# Altium PCB CM0P013.PcbDoc
Units mm, origin at the board's own origin, x right, y up, seen from the top; angles counter-clockwise.
Board outline 72.82 x 28.53 mm, 2 copper layers (Top Layer, Bottom Layer), stack 1.07 mm thick; 55 components, 29 nets, 137 pads, 4 vias.
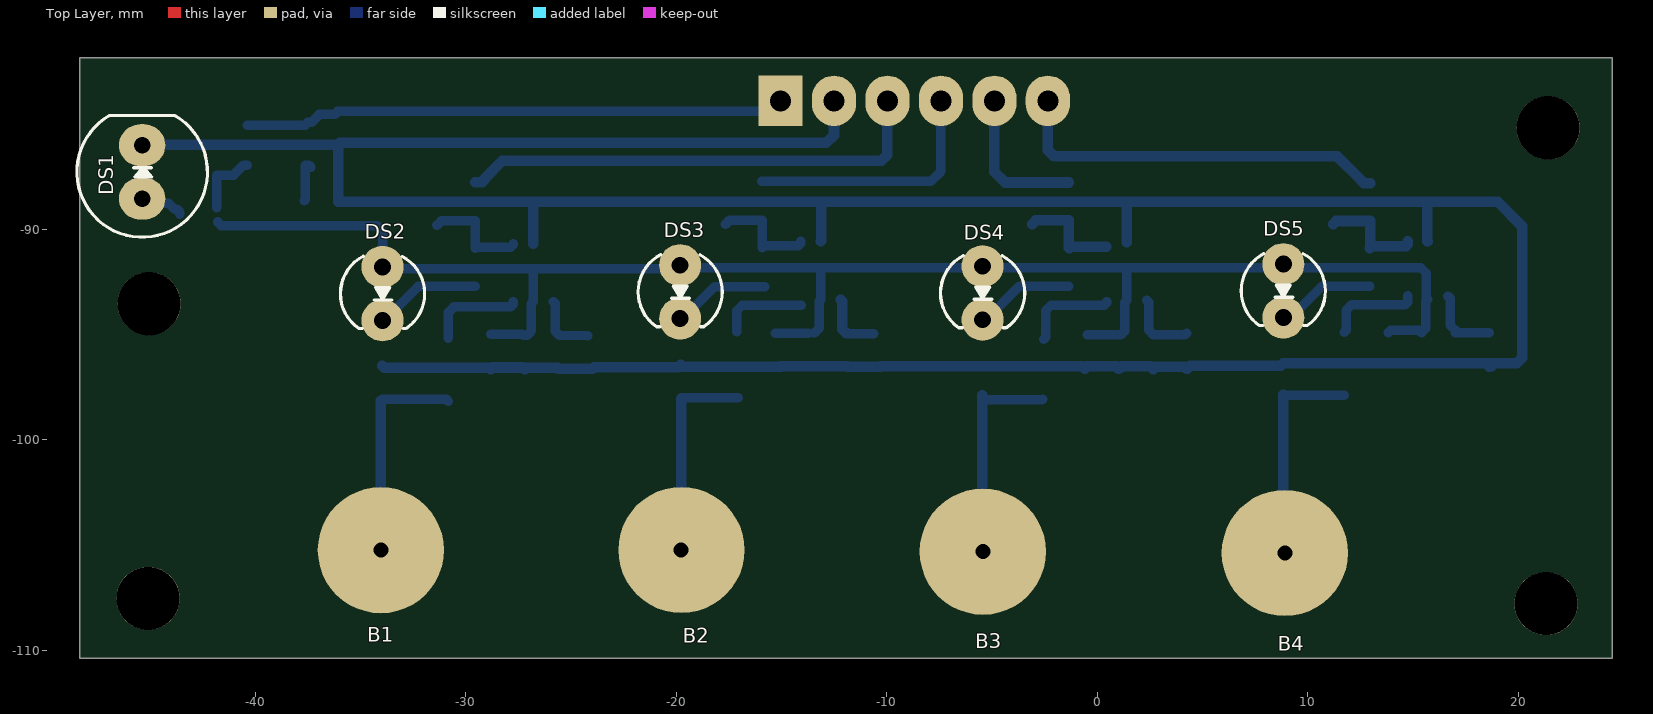
[diagram p0: Top Layer view]
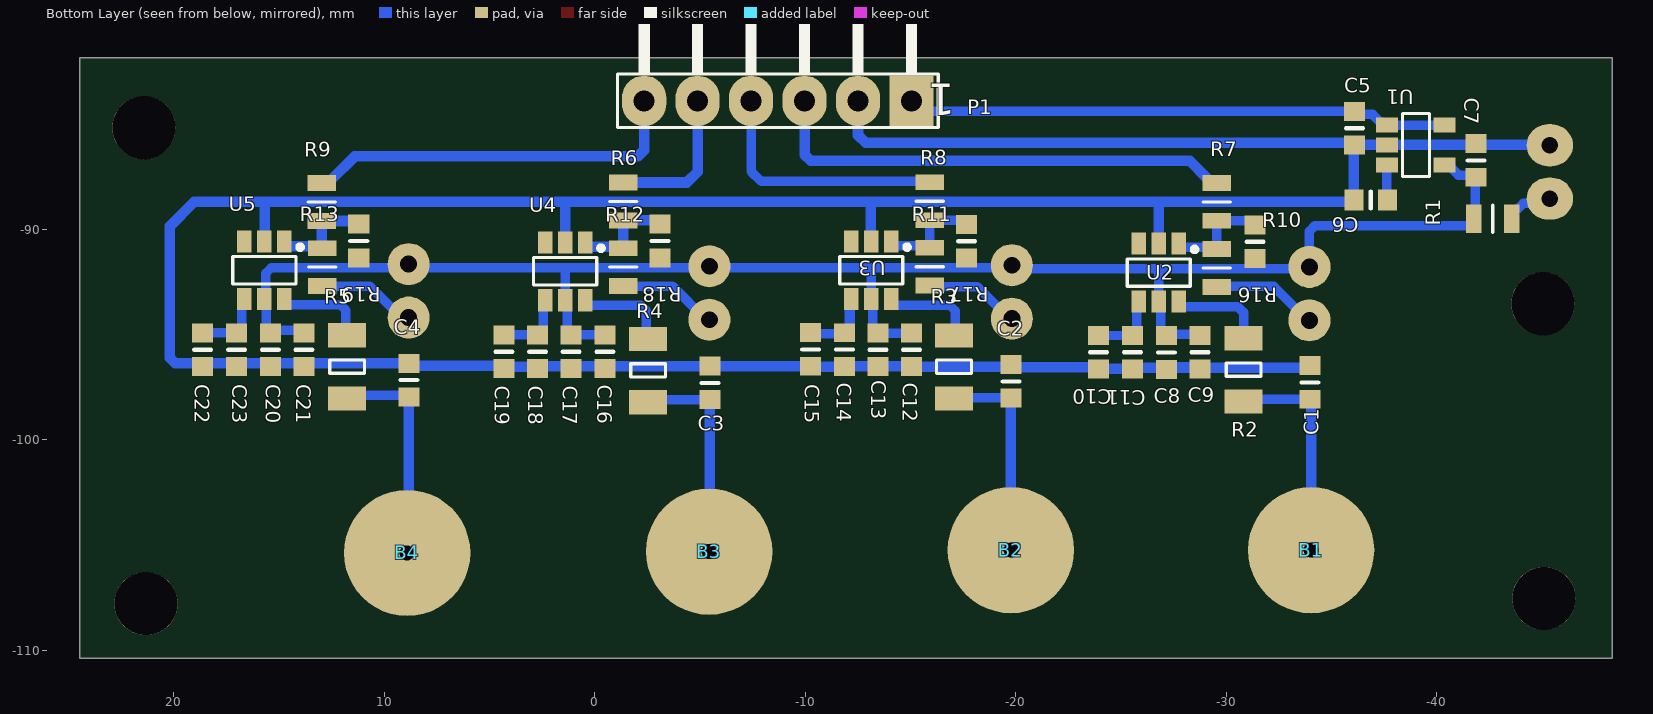
[diagram p1: Bottom Layer view, seen from below]
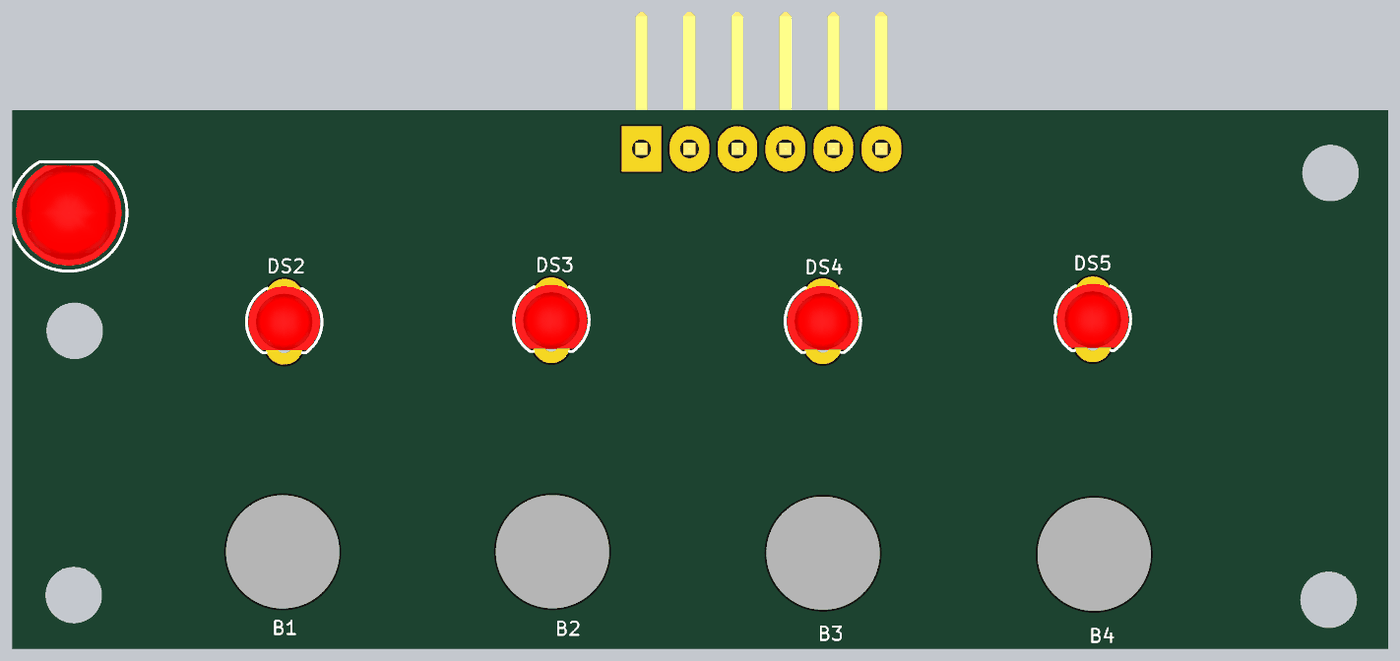
[diagram p2: 3D render of the assembled board from above, using the file's embedded part models]
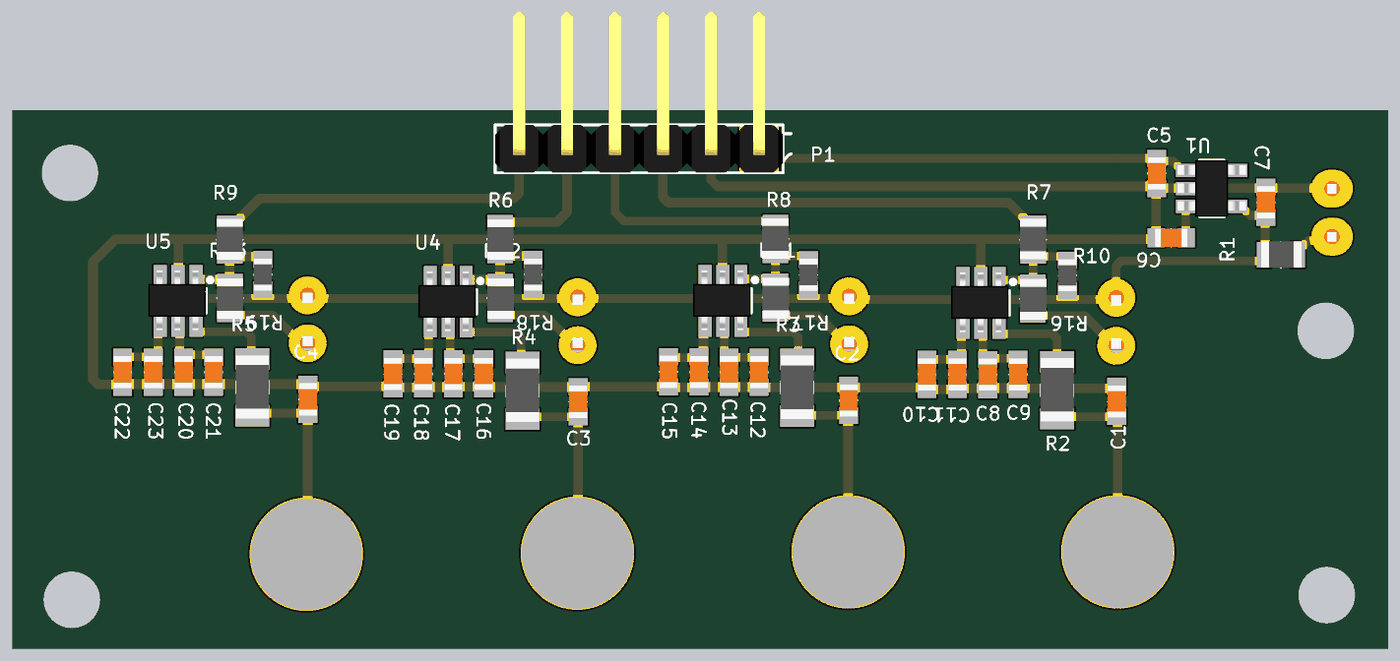
[diagram p3: 3D render of the assembled board from below, using the file's embedded part models]

## Layer stack, top to bottom
Top Solder: solder mask 0.01, Solder Resist, Dk 3.5
Top Layer: signal copper 0.035
Dielectric1: core 1, FR-4, Dk 4.8
Bottom Layer: signal copper 0.035
Bottom Solder: solder mask 0.0102, Solder Resist, Dk 3.5

## Board outline
-48.35,-110.38 24.47,-110.38 24.47,-81.85 -48.35,-81.85

## Design rules (kind name [scope] priority, off if disabled: settings)
Clearance "Route Clearance" [((ObjectKind = 'Track') or (Objectkind = 'Arc')) And (Layer = 'KeepOutLayer') And (Width = AsMM(0.005))] p1: gap=0.35 ignorepadtopadclearanceinfootprint=FALSE except(0: Arc-Hole Track-Hole SMDPad-Hole THPad-Hole Via-Hole Fill-Hole Poly-Hole Region-Hole Text-Hole)
Clearance "V-Score Clearance" [(ObjectKind = 'Track') And (Layer = 'KeepOutLayer') And (Width = AsMM(0.01))] p2: gap=0.5 ignorepadtopadclearanceinfootprint=FALSE except(0: Arc-Hole Track-Hole SMDPad-Hole THPad-Hole Via-Hole Fill-Hole Poly-Hole Region-Hole Text-Hole)
Clearance Via-SMD-Clearance [isvia vs onsoldermask] p3: gap=0.1 ignorepadtopadclearanceinfootprint=FALSE except(0: Arc-Hole Track-Hole SMDPad-Hole THPad-Hole Via-Hole Fill-Hole Poly-Hole Region-Hole Text-Hole)
Clearance "Cu Pour Top" [Innamedpolygon ('Top')] p4: gap=0.3 ignorepadtopadclearanceinfootprint=FALSE except(0: Arc-Hole Track-Hole SMDPad-Hole THPad-Hole Via-Hole Fill-Hole Poly-Hole Region-Hole Text-Hole)
Clearance "Cu Pour Bot" [Innamedpolygon ('Bot')] p5: gap=0.3 ignorepadtopadclearanceinfootprint=FALSE except(0: Arc-Hole Track-Hole SMDPad-Hole THPad-Hole Via-Hole Fill-Hole Poly-Hole Region-Hole Text-Hole)
Clearance Clearance_General [All] p6: gap=0.2 ignorepadtopadclearanceinfootprint=FALSE except(0: Arc-Hole Track-Hole SMDPad-Hole THPad-Hole Via-Hole Fill-Hole Poly-Hole Region-Hole Text-Hole)
Clearance "Mountinghole Clearance" [(ObjectKind = 'Pad') And (Layer = 'MultiLayer') And (Net = 'No Net')] p7: gap=0.15 ignorepadtopadclearanceinfootprint=FALSE except(0: Arc-Hole Track-Hole SMDPad-Hole THPad-Hole Via-Hole Fill-Hole Poly-Hole Region-Hole Text-Hole)
Clearance "Testpoint Spacing" [hasfootprint('TEST-POINT-1.5MM') vs hasfootprint('TEST-POINT-1.5MM')] p8: gap=0.8 ignorepadtopadclearanceinfootprint=FALSE except(0: Arc-Hole Track-Hole SMDPad-Hole THPad-Hole Via-Hole Fill-Hole Poly-Hole Region-Hole Text-Hole)
Clearance "Handsolder Top" [(Name = 'Component name') or (Name = 'Component name') or (Name = 'Component name') vs not(onbottom) and (not(istrack or (Layer = 'KeepOutLayer')))] p9: gap=1 ignorepadtopadclearanceinfootprint=FALSE except(0: Arc-Hole Track-Hole SMDPad-Hole THPad-Hole Via-Hole Fill-Hole Poly-Hole Region-Hole Text-Hole)
ComponentClearance [All] p1: gap=0.5 collisioncheckmode=3 verticalgap=0.5 showdistances=FALSE
DiffPairsRouting [All] p1: maxlimit=0.3 minlimit=0.15 mostfreqgap=0.2 toplayer_minwidth=0.381 toplayer_maxwidth=0.381 toplayer_prefwidth=0.381 bottomlayer_minwidth=0.381 bottomlayer_maxwidth=0.381 bottomlayer_prefwidth=0.381 maxuncoupledlength=12.7
FabricationTestPointUsage TestPointUsage [All] p1 off: valid=0 allowmultiple=FALSE
FabricationTestpoint Testpoint [All] p1 off: side=3 testpointundercomponent=TRUE minsize=1.016 maxsize=2.54 preferedsize=1.524 minholesize=0 maxholesize=1.016 preferedholesize=0.813 testpointgrid=0.025 allowsidetop=TRUE allowsidebottom=TRUE usegrid=TRUE gridtolerance=0
FanoutControl Fanout_BGA [IsBGA] p1 off: bgadir=Out bgaviamode=Centered fanoutstyle=Auto fanoutdirection=Alternating viagrid=0.025 // Fanout_BGA (Default Rule)
FanoutControl Fanout_LCC [IsLCC] p2 off: bgadir=Out bgaviamode=Centered fanoutstyle=Auto fanoutdirection=Alternating viagrid=0.025 // Fanout_LCC (Default Rule)
FanoutControl Fanout_SOIC [IsSOIC] p3 off: bgadir=Out bgaviamode=Centered fanoutstyle=Auto fanoutdirection=Alternating viagrid=0.025 // Fanout_SOIC (Default Rule)
FanoutControl Fanout_Small [(CompPinCount < 5)] p4 off: bgadir=Out bgaviamode=Centered fanoutstyle=Auto fanoutdirection=OutThenIn viagrid=0.025 // Fanout_Small (Default Rule)
FanoutControl Fanout_Default [All] p5 off: bgadir=Out bgaviamode=Centered fanoutstyle=Auto fanoutdirection=Alternating viagrid=0.025 // Fanout_Default (Default Rule)
HoleSize [All] p1 off: absolutevalues=TRUE maxlimit=4 minlimit=0.3 maxpercent=80.000 minpercent=20.000
HoleToHoleClearance [All] p1: gap=0.3 allowstackedmicrovias=TRUE
LayerPairs [All] p1 off: enforce=TRUE
MinimumSolderMaskSliver [All] p1: minsoldermaskwidth=0.2
PlaneClearance [All] p1 off: clearance=0.3
PlaneConnect PlaneConnect_Pads [Ispad] p1 off: planeconnectstyle=Relief reliefexpansion=0.5 reliefentries=4 reliefconductorwidth=0.35 reliefairgap=0.25
PlaneConnect PlaneConnect_Vias [Isvia] p2 off: planeconnectstyle=Direct reliefexpansion=0.508 reliefentries=4 reliefconductorwidth=0.254 reliefairgap=0.254
PolygonConnect PolygonConnectVia [IsVia] p1: connectstyle=Direct reliefconductorwidth=0.254 reliefentries=4 polygonreliefangle="90 Angle" airgapwidth=0.254
PolygonConnect [All] p2: connectstyle=Relief reliefconductorwidth=0.5 reliefentries=4 polygonreliefangle="90 Angle" airgapwidth=0.254
RoomDefinition Touch_Buttons [InComponentClass('Touch_Buttons')] p1: confinementstyle=ConfineIn formatcopy=TRUE lockcomponents=FALSE outline -416.179,-281.835 -365.379,-281.835 -365.379,-256.435 -416.179,-256.435
RoutingCorners [All] p1: cornerstyle=45-Degree minsetback=2.5 maxsetback=2.5
RoutingPriority [All] p1 off: routingpriority=0
RoutingTopology [All] p1 off: topology=Shortest
RoutingVias "Pwr Vias" [Isvia] p1: holewidth=0.4 width=0.8 viastyle="Through Hole" minholewidth=0.2 minwidth=0.5 maxholewidth=2 maxwidth=5
RoutingVias RoutingVias_General [All] p2: holewidth=0.4 width=0.8 viastyle="Through Hole" minholewidth=0.3 minwidth=0.65 maxholewidth=0.5 maxwidth=0.9
SilkToSilkClearance [All] p1: silktosilkclearance=0.15
SilkToSolderMaskClearance SilkscreenOverComponentPads [isdesignator vs onsoldermask] p1: minsilkscreentomaskgap=0.1 clearancetoexposedcopper=TRUE
SolderMaskExpansion "Via Soldermask" [isvia] p1: expansion=-1 istentingtop=FALSE
SolderMaskExpansion [All] p2: expansion=0.1 istentingtop=FALSE
ViasUnderSMD [All] p1: allowed=FALSE
Width Width_Power [InNetClass('POWER')] p1 off: maxlimit=1 minlimit=0.25 preferedwidth=0.5
Width Width_General [All] p2: maxlimit=5 minlimit=0.2 preferedwidth=0.2
10 further rules are at their usual default settings.

## Components (designator, comment, footprint, x,y, rotation, side; value= is the part's Value field where it differs from the comment)
B1 "REx1.0y0.3" MPAD-SM:REX0.3Y1.0 -34.04,-105.25 r0 top locked
B2 "" MPAD-SM:REX0.3Y1.0 -19.77,-105.25 r0 top locked value=REx1.0y0.3
B3 "" MPAD-SM:REX0.3Y1.0 -5.44,-105.32 r0 top locked value=REx1.0y0.3
B4 "" MPAD-SM:REX0.3Y1.0 8.91,-105.38 r0 top locked value=REx1.0y0.3
C1 "100pF" C-0603 -33.98,-97.28 r270 bottom
C2 "100pF" C-0603 -19.79,-97.23 r270 bottom
C3 "100pF" C-0603 -5.48,-97.3 r270 bottom
C4 "100pF" C-0603 8.83,-97.17 r270 bottom
C5 "100nF" C-0603 -36.1,-85.2 r90 bottom
C6 "100nF" C-0603 -36.87,-88.61 r180 bottom
C7 "10uF" C-0603 -41.88,-86.73 r270 bottom
C8 "100pF" C-0603 -27.16,-95.86 r90 bottom
C9 "1uF" C-0603 -28.76,-95.85 r90 bottom
C10 "1uF" C-0603 -25.55,-95.85 r90 bottom
C11 "100pF" C-0603 -23.94,-95.85 r90 bottom
C12 "100pF" C-0603 -15.05,-95.73 r90 bottom
C13 "1uF" C-0603 -13.46,-95.73 r90 bottom
C14 "1uF" C-0603 -11.87,-95.72 r90 bottom
C15 "100pF" C-0603 -10.26,-95.71 r90 bottom
C16 "100pF" C-0603 -0.48,-95.82 r90 bottom
C17 "1uF" C-0603 1.12,-95.82 r90 bottom
C18 "1uF" C-0603 2.71,-95.82 r90 bottom
C19 "100pF" C-0603 4.32,-95.82 r90 bottom
C20 "100pF" C-0603 15.41,-95.73 r90 bottom
C21 "1uF" C-0603 13.82,-95.73 r90 bottom
C22 "1uF" C-0603 18.63,-95.73 r90 bottom
C23 "100pF" C-0603 17.01,-95.73 r90 bottom
DS1 "5mm Red Flange" D-LED-5MM-FLANGED-RED -45.38,-87.28 r180 top
DS2 "3mm Red Flange" D-LED-3MM-FLANGED-RED -33.96,-93.06 r0 top
DS3 "3mm Red Flange" D-LED-3MM-FLANGED-RED -19.82,-92.98 r0 top
DS4 "3mm Red Flange" D-LED-3MM-FLANGED-RED -5.45,-93.03 r0 top
DS5 "3mm Red Flange" D-LED-3MM-FLANGED-RED 8.84,-92.93 r0 top
P1 "6W-SIL-V" P-BERG-6W-HDR-RA-SIL -8.7,-83.9 r0 bottom
R1 "220R" R-0805-L -42.67,-89.51 r0 bottom
R2 "470R" R-1206 -30.83,-96.68 r90 bottom
R3 "470R" R-1206 -17.07,-96.55 r90 bottom
R4 "470R" R-1206 -2.54,-96.72 r90 bottom
R5 "470R" R-1206 11.76,-96.54 r90 bottom
R6 "0R" R-0805-L -1.35,-88.68 r90 bottom
R7 "0R" R-0805-L -29.56,-88.7 r270 bottom
R8 "0R" R-0805-L -15.92,-88.67 r270 bottom
R9 "0R" R-0805-L 12.96,-88.71 r270 bottom
R10 "4.7K" R-0805-L -29.55,-91.84 r90 bottom
R11 "4.7K" R-0805-L -15.92,-91.78 r90 bottom
R12 "4.7K" R-0805-L -1.36,-91.8 r90 bottom
R13 "4.7K" R-0805-L 12.95,-91.8 r90 bottom
R16 "10K" R-0603 -31.38,-90.6 r270 bottom
R17 "10K" R-0603 -17.67,-90.57 r270 bottom
R18 "10K" R-0603 -3.1,-90.56 r270 bottom
R19 "10K" R-0603 11.21,-90.56 r270 bottom
U1 "LK112SM33TR" SOT-23-5 -39.01,-86 r180 bottom
U2 "IQS127D" SOT-23-6 -26.8,-92.06 r270 bottom
U3 "IQS127D" SOT-23-6 -13.14,-91.95 r270 bottom
U4 "IQS127D" SOT-23-6 1.4,-92 r270 bottom
U5 "IQS127D" SOT-23-6 15.7,-91.95 r270 bottom

## Footprints (in the part's own frame and the unit in brackets; to place one, negate y for a bottom-side part, rotate by r counter-clockwise, add the part's x,y. Pads: shape width x height; smd on the part's side, far side on the other; paste and mask are expansions set on the pad)
C-0603 [mm] "Chip Capacitor, 2-Leads, Body 1.6x0.8mm, IPC Medium Density"
  rect 0.9x1 smd: 1(-0.8,0) 2(0.8,0)
  silkscreen extent 0,-0.4 0,0.4, body extent -0.85,-0.48 0.85,0.47, height 0.95
D-LED-3MM-FLANGED-RED [mm] "Discrete 3mm Red Flanged LED, 2-Leads, Body Diam 3.9x5.65mm, IPC Medium Density"
  round 2 hole 0.8: 1(0,-1.27) 2(0,1.27)
  silkscreen extent -2,-1.65 2,1.78, body extent -1.9,-1.51 1.9,1.89, height 5.38
D-LED-5MM-FLANGED-RED [mm] "Discrete 5mm Flanged Red LED, 2-Leads, Body Diam 5.8x8.7mm, IPC Medium Density"
  oval 2.2x2 hole 0.8: 1(0,-1.27) 2(0,1.27)
  silkscreen extent -3.1,-2.69 3.1,3.1, body extent -2.82,-2.49 2.78,2.81, height 8.6
MPAD-SM:REX0.3Y1.0 [mm] "SMD Pad,1-Lead, Body 0.3mm x 1.0mm (max),IPC Medium Density"
  round 6 smd far side paste-0.05: 1(0,0)
P-BERG-6W-HDR-RA-SIL [mm] "SIL,Horizontal,6-Leads, Body 15.24x8.54mm (max), Pitch 2.54mm, IPC Medium Density"
  rect 2.1x2.4 hole 1: 1(-6.35,0)
  oval 2.1x2.4 hole 1: 2(-3.81,0) 3(-1.27,0) 4(1.27,0) 5(3.81,0) 6(6.35,0)
  silkscreen extent -7.62,-7.26 7.62,1.27, body extent -7.62,-7.27 7.62,1.27, height 5.16
R-0603 [mm] "Chip Resistor, 2-Leads, Body 1.6x0.8mm, IPC Medium Density"
  rect 0.9x1 smd: 1(-0.8,0) 2(0.8,0)
  silkscreen extent 0,-0.4 0,0.4, body extent -0.85,-0.48 0.85,0.47, height 0.6
R-0805-L [mm] "Chip Resistor, 2-Leads, Body 2.1x1.3mm, IPC Medium Density"
  rect 0.75x1.35 smd: 1(-0.9,0) 2(0.9,0)
  silkscreen extent 0,-0.65 0,0.65, body extent -1.1,-0.71 1.05,0.69, height 0.6
R-1206 [mm] "Chip Resistor, 2-Leads, Body 3.1x1.6mm, IPC Medium Density"
  rect 1.15x1.8 smd: 1(-1.5,0) 2(1.5,0)
  silkscreen extent -0.31,-0.82 0.33,0.83, body extent -1.65,-0.87 1.7,0.88, height 0.71
SOT-23-5 [mm] "SOT23, 5-Leads, Body 3.0x3.0mm (max), Pitch 0.95mm, IPC Medium Density"
  rect 1.05x0.7 smd: 1(-1.375,0.95) 2(-1.375,0) 3(-1.375,-0.95) 4(1.375,-0.95) 5(1.375,0.95)
  silkscreen extent -0.63,-1.5 0.65,1.5, body extent -1.81,-1.5 1.81,1.5, height 1.4
SOT-23-6 [mm] "SOT23, 6-Leads, Body 3.0x3.0mm (max), Pitch 0.95mm, IPC Medium Density"
  rect 1.05x0.7 smd: 1(-1.375,0.95) 2(-1.375,0) 3(-1.375,-0.95) 4(1.375,-0.95) 5(1.375,0) 6(1.375,0.95)
  silkscreen extent -1.2,-1.5 0.65,1.8, body extent -1.6,-1.58 1.55,1.47, height 1.4

## Part data
B1 B2 B3 B4: library part MPAD-SM-REx1.0y0.3, ComponentLink1Description="Footprint Detail", ComponentLink2Description="Application Note", ComponentLink3Description="Layout Guidelines", Generated_By=GHM
C1 C2 C3 C4: library part "CAP 100pF 1206 CER COG 5% 50V", "Capacitor, Ceramic, 100pF, 1206, COG, 5%, 50V", Tolerance=5%, Voltage=50V, ComponentLink1Description="Footprint Detail", ComponentLink2Description="Application Note", ComponentLink3Description="Layout Guidelines", Generated_By=GHM, Generated_Date=2010-06-11, Local_Supplier=Communica, Local_Supplier_PN="CHC1206 100P COG 50V", Pin_Count=2, Supplier=Azoteq, Type=SMT
C5 C6: library part "CAP 100nF 0603 CER X7R 10% 50V", "Capacitor, Ceramic, 100nF, 0603, X7R, 10%, 50V", Manufacturer=Samsung, Manufacturer_PN=CL10B104KB8NNNC, Tolerance=10%, Voltage=50V, ComponentLink1Description="Footprint Detail", ComponentLink2Description="Application Note", ComponentLink3Description="Layout Guidelines", Generated_By=GHM, Generated_Date=2009-10-12, HelpURL="\\Dentergems\pcbcad\Datasheets\Capacitors\Samsung Ceramic.pdf", Int_Part_Number=CAP0032, Pin_Count=2, Type=SMT
C7: library part "CAP 10uF 0603 CER X5R 20% 16V", "Capacitor, Ceramic, 10uF, 0603, X5R, 20%, 16V Samsung", Manufacturer=Samsung, Manufacturer_PN=CL10A106MO8NQNC, Tolerance=20%, Voltage=16V, ComponentLink1Description="Footprint Detail", ComponentLink2Description="Application Note", ComponentLink3Description="Layout Guidelines", Generated_By=GHM, Generated_Date=2013-08-07, HelpURL=\\Dentergems\pcbcad\Datasheets\Capacitors\Samsung\CL-Series.pdf, Int_Part_Number=CAP0078, Pin_Count=2, Type=SMT
C8 C11 C12 C15 C16 C19 C20 C23: library part "CAP 100pF 0603 CER COG 5% 50V", "Capacitor, Ceramic, 100pF, 0603, COG, 5%, 50V", Tolerance=5%, Voltage=50V, ComponentLink1Description="Footprint Detail", ComponentLink2Description="Application Note", ComponentLink3Description="Layout Guidelines", Generated_By=GHM, Generated_Date=2010-06-17, HelpURL="\\Azoteq-files1\pcbcad\Datasheets\Capacitors\AVX COG Ceramic.pdf", Int_Part_Number=CAP0064, Local_Supplier=Communica, Local_Supplier_PN="CHC0603 100P COG 50V", Pin_Count=2, Type=SMT
C9 C10 C13 C14 C17 C18 C21 C22: library part "CAP 1u0F 0603 CER X7R 10% 16V", "Capacitor, Ceramic, 1uF, 0603, X7R, 10%, 16V", Manufacturer=TDK, Manufacturer_PN=C1608X7R1C105K, Tolerance=10%, Voltage=16V, ComponentLink1Description="Footprint Detail", ComponentLink2Description="Application Note", ComponentLink3Description="Layout Guidelines", Generated_By=GHM, Generated_Date=2009-10-12, Int_Part_Number=CAP0031, Pin_Count=2, Type=SMT
DS1: library part LED-5MM-RED-V-FLANGE, ComponentLink1Description="Footprint Detail", ComponentLink2Description="Application Note", ComponentLink3Description="Layout Guidelines", Generated_By=GHM, Generated_Date=2010-01-14, Local_Supplier=Communica, Local_Supplier_PN="L-53 HD", Pin_Count=2, Type=THP
DS2 DS3 DS4 DS5: library part LED-3MM-RED-V-FLANGE, ComponentLink1Description="Footprint Detail", ComponentLink2Description="Application Note", ComponentLink3Description="Layout Guidelines", Generated_By=GHM, Generated_Date=2010-01-14, Offshore_Supplier="China Market", Offshore_Supplier_PN=302H7RD, Pin_Count=2, Type=THP
P1: library part BERG-6W-HDR-V-SIL, "Connector, Header, Verticle, SIL, 6W, THP", Manufacturer="Ho Chien", ComponentLink1Description="Footprint Detail", ComponentLink2Description="Application Note", ComponentLink3Description="Layout Guidelines", Generated_By=GHM, HelpURL="\\azoteq-files1\pcbcad\Datasheets\Headers\Ho Chien Pin Header 2.54mm.pdf", Local_Supplier=Communica, Local_Supplier_PN=708401, Pin_Count=6, Supplier=Azoteq, Type=THP
R1: library part "RES 220R 1206 1% 0.25W", "Resistor, 220R, 1206, 1%, 0.25W", Tolerance=1%, ComponentLink1Description="Footprint Detail", ComponentLink2Description="Application Note", ComponentLink3Description="Layout Guidelines", Generated_By=GHM, Generated_Date=2010-07-06, Local_Supplier=Communica, Local_Supplier_PN="CHR1206 1% 220R", Pin_Count=2, Type=SMT, Wattage=0.25W
R2 R3 R4 R5: library part "RES 470R 0603 1% 0.1W", "Resistor, 470R, 0603, 1%, 0.1W", Tolerance=1%, ComponentLink1Description="Footprint Detail", ComponentLink2Description="Application Note", ComponentLink3Description="Layout Guidelines", Generated_By=GHM, Generated_Date=2009-10-13, Int_Part_Number=RES0106, Local_Supplier=Communica, Local_Supplier_PN="CHR0603 1% 470R", Pin_Count=2, Type=SMT, Wattage=0.1W
R6 R7 R8 R9: library part "RES 0R 0805 1% 0.125W", "Resistor, 0R, 0805, 1%, 0.125W", Tolerance=1%, ComponentLink1Description="Footprint Detail", ComponentLink2Description="Application Note", ComponentLink3Description="Layout Guidelines", Generated_By=GHM, Generated_Date=2010-08-18, Pin_Count=2, Type=SMT, Wattage=0.125W
R10 R11 R12 R13: library part "RES 4K7 0603 1% 0.1W", "Resistor, 4K7, 0603, 1%, 0.1W", Tolerance=1%, ComponentLink1Description="Footprint Detail", ComponentLink2Description="Application Note", ComponentLink3Description="Layout Guidelines", Generated_By=GHM, Generated_Date=2009-10-13, Int_Part_Number=RES0003, Local_Supplier=Communica, Local_Supplier_PN="CHR0603 1% 4K7", Pin_Count=2, Type=SMT, Wattage=0.1W
R16 R17 R18 R19: library part "RES 10K 0603 1% 0.1W", "Resistor, 10K, 0603, 1%, 0.1W", Tolerance=1%, ComponentLink1Description="Footprint Detail", ComponentLink2Description="Application Note", ComponentLink3Description="Layout Guidelines", Generated_By=GHM, Generated_Date=2009-10-13, Int_Part_Number=RES0025, Local_Supplier=Communica, Local_Supplier_PN="CHR0603 1% 10K", Pin_Count=2, Type=SMT, Wattage=0.1W
U1: library part LK112SM33TR-SOT-23-5, Manufacturer="ST Micro Electronics", ComponentLink1Description="Footprint Detail", ComponentLink2Description="Application Note", ComponentLink3Description="Layout Guidelines", Generated_By=GHM, Generated_Date=2010-01-05, HelpURL="\\Dentergems\pcbcad\Datasheets\Voltage Regulators\ST\LK112Sxx.pdf", Manufacturer_PN=LK112SM33TR
U2 U3 U4 U5: Manufacturer=Azoteq, ComponentLink1Description="Footprint Detail", ComponentLink2Description="Application Note", ComponentLink3Description="Layout Guidelines", Generated_By=GHM, Generated_Date=2010-02-19, Manufacturer_PN=IQS127D

## Free pads (board coordinates)
  round 3 hole 3 unplated paste+0 mask+0: 0(-45.1,-107.54) 0(-45.05,-93.54) 0(21.32,-107.79) 0(21.42,-85.18)
  round 6 smd: 1(-34.04,-105.25) 1(-19.76,-105.24) 1(-5.44,-105.32) 1(8.91,-105.38)

## Via types
v1: diameter 1.27, hole 0.711, Top Layer to Bottom Layer, 4 vias

## Nets (pads, with @x,y where several pads share a name; then routed paths per layer and width w, separated by ;. In a path a pad name is that pad's centre, name@x,y a point inside that pad or via, vN(x,y) a via of type N, cw(c..) or ccw(c..) an arc to the next point about the centre after c; other vN are vias at no path point)
3V3: C7.2 C8.2 C9.2 C12.2 C13.2 C16.2 C17.2 C20.2 C21.2 DS2.2 DS3.2 DS4.2 DS5.2 R1.2 R16.2 R17.2 R18.2 R19.2 U1.4 U2.5 U3.5 U4.5 U5.5 | length 81.2
  Bottom Layer w0.45: R1.2@-41.841,-88.981 -41.841,-87.428 -41.038,-87.428 -40.685,-87.075 -40.56,-86.95 U1.4 ; R1.2@-41.79,-89.64 -41.79,-89.66 -41.62,-89.83 -34.224,-89.83 -33.96,-90.094 DS2.2 -33.87,-91.88 -26.8,-91.88 ; C9.2@-28.81,-94.99 -27.32,-94.99 -27.27,-95.04 C8.2@-27.15,-95.04 ; C8.2@-27.1,-95.05 C8.2@-26.885,-94.835 ; C8.2@-26.897,-94.835 -26.897,-93.532 U2.5 -26.8,-91.88 ; DS3.2@-20.29,-91.88 -26.8,-91.88 ; DS3.2@-20.29,-91.83 DS3.2@-19.94,-91.83 ; DS3.2 DS3.2@-19.94,-91.83 ; C12.2@-15.3,-94.95 C13.2@-13.74,-94.95 ; C13.2 -13.435,-94.93 -13.21,-94.705 -13.21,-93.425 -13.14,-93.355 U3.5 -13.14,-91.83 ; C16.2 C17.2 1.3,-94.84 1.3,-93.475 U4.5 1.4,-91.83 ; DS5.2@8.33,-91.83 1.4,-91.83 ; DS5.2@9.11,-91.83 15.366,-91.83 15.63,-92.094 15.63,-93.255 U5.5 15.61,-93.415 15.61,-94.705 C20.2@15.535,-94.78 ; C21.2 13.94,-94.81 15.29,-94.81 C20.2 ; DS3.2@-19.94,-91.83 -13.14,-91.83 ; -13.14,-91.83 -5.45,-91.83 1.4,-91.83
CX1: B1.1 C1.2 pad.1@-34.04,-105.25 R2.1 | length 10.5
  Bottom Layer w0.45: v1(-34.04,-105.25) B1.1@-33.95,-105.16 ; C1.2@-34.04,-98.14 C1.2 -33.97,-98.09 -30.92,-98.09 R2.1
  Bottom Layer w0.5: v1(-34.04,-105.25) C1.2@-34.04,-98.14
CX2: B2.1 C2.2 pad.1@-19.76,-105.24 R3.1 | length 9.9
  Bottom Layer w0.45: C2.2 C2.2@-19.77,-98.05 ; C2.2@-19.77,-98.01 R3.1@-17.07,-98.01
  Bottom Layer w0.5: v1(-19.77,-105.25) C2.2@-19.77,-98.05
CX3: B3.1 C3.2 pad.1@-5.44,-105.32 R4.1 | length 10.5
  Bottom Layer w0.45: B3.1@-5.56,-105.2 v1(-5.44,-105.32) B3.1@-5.47,-105.29 ; C3.2 -2.61,-98.1 R4.1@-2.6,-98.09
  Bottom Layer w0.5: B3.1@-5.47,-105.29 C3.2@-5.47,-97.88
CX4: B4.1 C4.2 pad.1@8.91,-105.38 R5.1 | length 10.3
  Bottom Layer w0.45: C4.2@8.87,-97.9 R5.1@11.73,-97.9
  Bottom Layer w0.5: B4.1@8.84,-105.31 C4.2@8.84,-97.86
  other v1: 8.91,-105.38
GND: C1.1 C2.1 C3.1 C4.1 C5.1 C6.1 C7.1 C8.1 C9.1 C10.1 C11.1 C12.1 C13.1 C14.1 C15.1 C16.1 C17.1 C18.1 C19.1 C20.1 C21.1 C22.1 C23.1 DS1.1 P1.2 U1.2 U2.2 U3.2 U4.2 U5.2 | length 163.4
  Bottom Layer w0.5: DS1.1 -45.36,-85.99 -41.88,-85.99 -37.635,-85.99 -36.1,-85.99 -36.095,-85.995 C5.1@-36.09,-86 ; C6.1@-36.07,-88.69 -26.77,-88.69 ; C6.1@-36.07,-88.66 C6.1 ; C6.1@-36.07,-88.64 -36.07,-86.02 C5.1@-36.09,-86 ; C1.1 -33.88,-96.58 -28.89,-96.58 -28.82,-96.65 -28.74,-96.57 -27.29,-96.57 C8.1@-27.21,-96.65 ; C8.1@-27.14,-96.58 -25.66,-96.58 -25.6,-96.64 -23.99,-96.64 -23.91,-96.56 -19.92,-96.56 C2.1 -19.69,-96.53 C12.1 -15.04,-96.52 -13.46,-96.52 C14.1 -11.85,-96.54 -10.31,-96.54 C15.1@-10.29,-96.52 ; U2.2 -26.8,-88.72 -26.77,-88.69 ; U3.2 -13.11,-90.545 -13.11,-88.69 ; P1.2 -12.51,-85.53 -12.87,-85.89 -35.99,-85.89 C5.1 C5.1@-36.09,-86 ; C15.1 -5.49,-96.51 C3.1 -5.46,-96.52 -0.71,-96.52 -0.6,-96.63 -0.48,-96.51 0.9,-96.51 1.03,-96.64 1.15,-96.52 2.53,-96.52 2.66,-96.65 2.78,-96.53 4.15,-96.53 C19.1@4.26,-96.64 ; U4.2 1.4,-88.73 1.44,-88.69 ; C19.1@4.27,-96.63 4.41,-96.49 8.71,-96.49 C4.1 ; C4.1@8.83,-96.36 13.81,-96.36 15.41,-96.36 17.01,-96.36 18.61,-96.36 C22.1@18.75,-96.5 ; U5.2 15.688,-90.563 15.688,-88.69 ; C22.1 18.79,-96.37 19.936,-96.37 20.2,-96.106 20.2,-89.87 19.02,-88.69 15.688,-88.69 ; -26.77,-88.69 -13.11,-88.69 ; -13.11,-88.69 1.44,-88.69 ; 1.44,-88.69 15.688,-88.69
NetC6_2: C6.2 U1.3 | length 2
  Bottom Layer w0.45: C6.2@-37.67,-88.64 -37.635,-88.605 U1.3 -37.46,-86.95 U1.3@-37.36,-87.05
NetC10_2: C10.2 C11.2 U2.4 | length 3.1
  Bottom Layer w0.45: U2.4 -25.76,-93.525 -25.76,-94.84 C10.2 -24.23,-95.05 C11.2@-24.22,-95.06
NetC14_2: C14.2 C15.2 U3.4 | length 3
  Bottom Layer w0.45: C14.2@-11.94,-94.97 C15.2@-10.62,-94.97
  Bottom Layer w0.5: U3.4@-12.19,-93.355 -12.11,-93.435 -12.11,-94.75 C14.2@-11.94,-94.92
NetC18_2: C18.2 C19.2 U4.4 | length 3.4
  Bottom Layer w0.45: U4.4 2.44,-93.465 2.44,-94.575 2.445,-94.58 2.445,-94.795 2.67,-95.02 4.16,-95.02 C19.2@4.245,-94.935
NetC22_2: C22.2 C23.2 U5.4 | length 3.4
  Bottom Layer w0.45: U5.4@16.66,-93.175 16.76,-93.275 16.76,-94.555 16.985,-94.78 C23.2@17.01,-94.78 ; C23.2 17.02,-94.92 18.62,-94.92 C22.2
NetDS1_2: DS1.2 R1.1 | length 2.2
  Bottom Layer w0.45: DS1.2 -45.166,-88.764 -44.126,-88.764 -43.83,-89.06 -43.72,-89.06 -43.59,-89.19 R1.1@-43.59,-89.3
NetDS2_1: DS2.1 R10.1 | length 5.1
  Bottom Layer w0.45: DS2.1@-34.01,-94.35 -33.89,-94.35 -32.26,-92.72 -29.57,-92.72 R10.1@-29.55,-92.7
NetDS3_1: DS3.1 R11.1 | length 4.6
  Bottom Layer w0.45: DS3.1 -19.7,-94.25 -18.18,-92.73 R11.1@-15.81,-92.73
NetDS4_1: DS4.1 R12.1 | length 4.8
  Bottom Layer w0.45: DS4.1 -5.29,-94.3 -3.69,-92.7 R12.1
NetDS5_1: DS5.1 R13.1 | length 4.7
  Bottom Layer w0.45: DS5.1 9.19,-94.2 10.69,-92.7 R13.1
NetR2_2: R2.2 U2.6 | length 4.6
  Bottom Layer w0.45: R2.2 -30.83,-93.954 -30.566,-93.69 -27.875,-93.69 -27.75,-93.565 U2.6
NetR3_2: R3.2 U3.6 | length 4.2
  Bottom Layer w0.45: R3.2@-17.13,-94.87 -17.13,-93.874 -16.866,-93.61 U3.6@-14.06,-93.61
NetR4_2: R4.2 U4.6 | length 4.5
  Bottom Layer w0.45: R4.2 -2.46,-95.14 -2.46,-93.874 -2.196,-93.61 0.325,-93.61 0.44,-93.495 U4.6@0.44,-93.435
NetR5_2: R5.2 U5.6 | length 4.5
  Bottom Layer w0.45: R5.2@11.73,-94.9 11.826,-94.804 11.826,-93.844 12.09,-93.58 14.635,-93.58 14.75,-93.465 U5.6@14.75,-93.165
POUT1: U2.3
POUT2: U3.3
POUT3: U4.3
POUT4: U5.3
TOUT1: P1.3 R7.1 R7.2 R10.2 R16.1 U2.1 | length 27.7
  Bottom Layer w0.45: R16.1@-31.38,-89.82 -31.16,-89.6 R7.2 R10.2@-29.56,-90.782 ; R10.2@-29.55,-90.9 -29.51,-90.86 -27.875,-90.86 -27.75,-90.735 U2.1
  Bottom Layer w0.5: R7.1@-29.56,-87.77 -29.23,-87.77 -29.135,-87.675 -29.135,-87.615 -28.27,-86.75 -10.263,-86.75 -9.97,-86.457 P1.3
TOUT2: P1.4 R8.1 R8.2 R11.2 R17.1 U3.1 | length 17.2
  Bottom Layer w0.45: R17.1 -17.47,-89.57 R8.2 R11.2 -15.83,-90.79 -14.215,-90.79 -14.09,-90.665 U3.1 ; R8.1@-15.94,-87.73 -7.91,-87.73 -7.43,-87.25 P1.4
TOUT3: P1.5 R6.1 R6.2 R12.2 R18.1 U4.1 | length 12.1
  Bottom Layer w0.5: P1.5 -4.89,-87.26 -4.37,-87.78 R6.2 ; R18.1 -2.92,-89.58 R6.1 -1.35,-90.88 -1.33,-90.9 -1.27,-90.84 U4.1@0.43,-90.84
TOUT4: P1.6 R9.1 R9.2 R13.2 R19.1 U5.1 | length 23.4
  Bottom Layer w0.5: P1.6 -2.35,-86.237 -2.057,-86.53 11.39,-86.53 12.535,-87.675 12.535,-87.685 12.66,-87.81 R9.1 ; R19.1 11.36,-89.61 R9.2 R13.2@12.96,-90.89 ; R13.2 R13.2@12.96,-90.89 ; U5.1 14.75,-90.72 14.65,-90.82 13.03,-90.82 R13.2@12.96,-90.89
VCC: C5.2 P1.1 U1.1 U1.5 | length 26.3
  Bottom Layer w0.45: U1.5 U1.1 -37.51,-84.925 -37.335,-84.925 -36.957,-84.547 -36.217,-84.547 C5.2@-36.1,-84.43 ; C5.2 -15.775,-84.4 -15.039,-83.664 P1.1@-15.039,-83.275

## Silkscreen, mask and mechanical layers (free items; w line width, h text height)
PCB Outline:
  the board outline again, w0.3
Manufacturing Drawing:
  drawing of 3561 lines, arcs and shapes, not listed
  text "ALL DIMENSIONS IN mm" at 202.851,115.594 h2.79
  text "P C B    F A B R I C A T I O N    N O T E S" at -302.149,114.594 h5
  text "0" at 207.978,112.973 h2.79
  text "5" at 212.978,112.973 h2.79
  text "10" at 217.04,112.973 h2.79
  text "15" at 222.04,112.973 h2.79
  text "20" at 227.04,112.973 h2.79
  text "CONSTRUCTION" at -300.149,111.094 h3.5
  text "V-GROOVE DETAIL" at -150.824,109.844 h5
  text "Scale in Millimeters" at 208.383,107.516 h2.79
  text "FAB SPECIFICATION" at -300.149,107.094 h2.79
  text "IPC-6012 CLASS" at -266.149,107.094 h2.79
  text "1" at -242.149,107.094 h2.79
  text "2" at -236.149,107.094 h2.79
  text "3" at -230.149,107.094 h2.79
  text "MIL-SPEC P-55110" at -216.149,107.094 h2.79
  text "LEAD-FREE RoHS" at -300.149,104.094 h2.79
  text "APPLY TO PANELISED PCB IF APPLICABLE AND REQUESTED" at -168.474,104.054 h2.79
  text "ACCORDING TO EU DIRECTIVE 2011/65/EU (ROHS 2)" at -266.599,103.975 h2.79
  text "MATERIAL" at -300.049,100.944 h2.79
  text "FR4 COPPER-CLAD GLASS-EPOXY CONFORMING TO UL-796" at -266.049,100.944 h2.79
  text "FINAL PCB THICKNESS" at -300.049,97.944 h2.79
  text "0.8mm" at -263.049,97.944 h2.79
  text "1.0mm" at -252.049,97.944 h2.79
  text "1.2mm" at -240.799,97.944 h2.79
  text "1.6mm" at -230.049,97.944 h2.79
  text "2.4mm" at -219.049,97.944 h2.79
  text "OTHER___mm" at -207.799,97.944 h2.79
  text "±0.2mm" at -263.099,95.475 h2.2
  text "±0.2mm" at -251.599,95.475 h2.2
  text "±0.2mm" at -240.599,95.475 h2.2
  text "±0.2mm" at -229.849,95.475 h2.2
  text "±0.25mm" at -219.099,95.475 h2.2
  text "PCB THICKNESS" at -148.679,92.665 h2.5
  text "V-GROOVE WIDTH" at -124.679,92.665 h2.5
  text "GAP" at -92.679,92.665 h2.5
  text "LAYER COUNT" at -300.149,91.844 h2.79
  text "1" at -263.149,91.844 h2.79
  text "2" at -256.149,91.844 h2.79
  text "4" at -249.149,91.844 h2.79
  text "6" at -242.149,91.844 h2.79
  text "8" at -235.149,91.844 h2.79
  text "10" at -228.149,91.844 h2.79
  text "12" at -221.149,91.844 h2.79
  text "OTHER___" at -207.899,91.844 h2.79
  text "IMPEDENCE CONTROL" at -300.149,88.844 h2.79
  text "YES" at -263.149,88.844 h2.79
  text "NO" at -249.149,88.844 h2.79
  text "0,80mm" at -139.804,88.179 h2.79
  text "0,16mm +/- 0,10mm" at -126.326,88.046 h2.79
  text "0,3mm +/- 0,10mm" at -100.389,88.046 h2.79
  text "GAP" at -157.313,87.411 h2.79
  text "SPECIAL CORES" at -300.149,85.844 h2.79
  text "YES" at -263.149,85.844 h2.79
  text "NO" at -249.149,85.844 h2.79
  text "IF YES, SPECIFY _________________" at -238.149,85.844 h2.79
  text "1,55mm" at -139.804,84.369 h2.79
  text "0,50mm +/- 0,10mm" at -126.469,84.369 h2.79
  text "0,4mm +/- 0,10mm" at -100.434,84.369 h2.79
  text "BOARD EDGE" at -300.149,82.844 h2.79
  text "NO METAL BURRS AND SHARP EDGES" at -266.149,82.844 h2.79
  text "0,80mm +/- 0,10mm" at -126.326,80.681 h2.79
  text "0,5mm +/- 0,10mm" at -100.389,80.681 h2.79
  text "2,40mm" at -139.804,80.559 h2.79
  text "BOW & TWIST" at -300.149,79.844 h2.79
  text "1% MAX ON SMD PCBS" at -266.149,79.844 h2.79
  text "PROFILING" at -300.149,76.844 h2.79
  text "NC-ROUTE" at -263.149,76.844 h2.79
  text "V-SCORE" at -242.149,76.844 h2.79
  text "BOTH AS INDICATED" at -221.149,76.844 h2.79
  text "MAX DEVIATION 0,10mm" at -181.809,76.114 h2.79
  text "CONDUCTIVE MATERIAL" at -300.149,71.344 h3.5
  text "17um" at -263.149,67.344 h2.79
  text "35um" at -249.149,67.344 h2.79
  text "70um" at -235.149,67.344 h2.79
  text "______um   FINISHED" at -221.149,67.344 h2.79
  text "FINAL CU THICKNESS" at -299.849,67.225 h2.79
  text "PLATING FINISH" at -300.099,64.475 h2.79
  text "HASL     0.75um - 35um" at -263.149,64.094 h2.79
  text "& PARAMETERS" at -300.099,61.475 h2.79
  text "ENIG     Ni 3-6um Au 0.05um minimum" at -263.149,61.094 h2.79
  text "ASIG     Ag 0.7-1um Au 0.03um minimum" at -263.199,58.094 h2.79
  text "I-Sn     1um (minimum) 1.15um - 1.3um typ" at -263.149,55.094 h2.79
  text "I-Ag     0.05um (Thin) - 0.12um (Thick) minimum" at -263.149,52.025 h2.79
  text "OSP" at -263.149,48.925 h2.79
  text "SELECTIVE Au PLATING" at -300.149,45.844 h2.79
  text "NO" at -263.149,45.844 h2.79
  text "YES ON EDGE FINGERS" at -249.149,45.844 h2.79
  text "AS INDICATED" at -211.149,45.844 h2.79
  text "INTERCONNECTS" at -300.099,39.975 h3.5
  text "DRILL PROCESS" at -300.099,35.975 h2.79
  text "THT" at -263.099,35.975 h2.79
  text "BLIND & BURIED VIAS" at -249.099,35.975 h2.79
  text "LASER VIAS" at -211.099,35.975 h2.79
  text "HOLE WALL PLATING" at -300.099,32.975 h2.79
  text "AS SPECIFIED IN IPC-6012 CLASS" at -266.099,32.975 h2.79
  text "AS PER TABLE, AFTER TH PLATING (TOL -0.0mm +0.1mm)" at -266.082,30.003 h2.79
  text "FINAL HOLE SIZE" at -300.099,29.975 h2.79
  text "MIN HOLE SIZE (mm)" at -300.099,26.975 h2.79
  text "0.10" at -263.099,26.975 h2.79
  text "0.15" at -249.099,26.975 h2.79
  text "0.2" at -235.099,26.975 h2.79
  text "0.25" at -221.099,26.975 h2.79
  text "LARGER" at -207.099,26.975 h2.79
  text "QTY SIGNAL LAYERS" at -300.599,23.906 h2.79
  text "1" at -263.099,23.906 h2.79
  text "2" at -256.099,23.906 h2.79
  text "3" at -249.099,23.906 h2.79
  text "4" at -242.099,23.906 h2.79
  text "5" at -235.099,23.906 h2.79
  text "6" at -228.099,23.906 h2.79
  text "7" at -221.099,23.906 h2.79
  text "8" at -214.099,23.906 h2.79
  text "9" at -207.099,23.906 h2.79
  text "10" at -200.099,23.906 h2.79
  text "QTY COPPER PLANES" at -300.599,20.906 h2.79
  text "0" at -263.099,20.906 h2.79
  text "1" at -256.099,20.906 h2.79
  text "2" at -249.099,20.906 h2.79
  text "3" at -242.099,20.906 h2.79
  text "4" at -235.099,20.906 h2.79
  text "5" at -228.099,20.906 h2.79
  text "6" at -221.099,20.906 h2.79
  text "MIN TRACE WIDTH (mm)" at -300.599,17.906 h2.79
  text "0.10" at -263.099,17.906 h2.79
  text "0.15" at -249.099,17.906 h2.79
  text "0.2" at -235.099,17.906 h2.79
  text "0.3" at -221.099,17.906 h2.79
  text "LARGER" at -207.099,17.906 h2.79
  text "MIN TRACE SPACING (mm)" at -300.599,14.906 h2.79
  text "0.10" at -263.099,14.906 h2.79
  text "0.15" at -249.099,14.906 h2.79
  text "0.2" at -235.099,14.906 h2.79
  text "0.3" at -221.099,14.906 h2.79
  text "LARGER" at -207.099,14.906 h2.79
  text "COSMETICS" at -300.149,5.844 h3.5
  text "SOLDERMASK SIDES" at -300.149,2.344 h2.79
  text "TOP" at -263.149,2.344 h2.79
  text "BOT" at -249.149,2.344 h2.79
  text "BOTH SIDES" at -235.149,2.344 h2.79
  text "SOLDER MASK TYPE" at -300.149,-0.656 h2.79
  text "SOLDER MASK OVER BARE COPPER (SMOBC)" at -266.149,-0.656 h2.79
  text "SOLDER MASK COLOUR" at -300.149,-3.656 h2.79
  text "GRN" at -263.149,-3.656 h2.79
  text "BLUE" at -252.399,-3.656 h2.79
  text "YEL" at -240.399,-3.656 h2.79
  text "RED" at -229.649,-3.656 h2.79
  text "BLACK" at -203.899,-3.656 h2.79
  text "WHITE" at -218.549,-3.675 h2.79
  text "SOLDERMASK WEBBING" at -300.149,-6.656 h2.79
  text "GANG RELIEF NOT ALLOWED, UNLESS BELOW CAPABILITY" at -266.149,-6.656 h2.79
  text "SILKSCREEN COLOUR" at -300.099,-9.656 h2.79
  text "WHITE" at -263.099,-9.656 h2.79
  text "YEL" at -249.099,-9.656 h2.79
  text "BLACK" at -239.099,-9.656 h2.79
  text "OTHER ____________" at -218.599,-9.656 h2.79
  text "SILKSCREEN PRINT" at -300.099,-12.656 h2.79
  text "NO LEGEND TO BE APPLIED OVER SOLDER PADS" at -266.099,-12.656 h2.79
  text "SILKSCREEN QTY" at -300.099,-15.656 h2.79
  text "TOP" at -263.099,-15.656 h2.79
  text "BOT" at -249.099,-15.656 h2.79
  text "BOTH SIDES" at -235.099,-15.656 h2.79
  text "NONE" at -207.099,-15.656 h2.79
  text "SILKSCREEN LINE WIDTH" at -300.099,-18.656 h2.79
  text "0.15mm" at -263.099,-18.656 h2.79
  text "0.2mm" at -249.099,-18.656 h2.79
  text "SILKSCREEN OVER PADS" at -300.099,-21.656 h2.79
  text "NOT PERMITTED, PLEASE REMOVE IF PRESENT" at -266.099,-21.656 h2.79
  text "MANUFACTURING DEVIATIONS" at -300.099,-28.656 h3.5
  text "PAD REMOVAL" at -300.099,-32.656 h2.79
  text "ALLOWED ON UNUSED PADS ON INNER LAYERS" at -266.099,-32.656 h2.79
  text "TEARDROPPING" at -300.099,-35.656 h2.79
  text "PREFERRED" at -266.099,-35.656 h2.79
  text "Cu THIEVING" at -300.099,-38.656 h2.79
  text "ALLOWED ON PANEL STRIPS" at -266.099,-38.656 h2.79
  text "VIA SIZE REDUCTION" at -300.099,-41.656 h2.79
  text "NOT ALLOWED" at -266.099,-41.656 h2.79
  text "ADDITIONAL REQUIREMENTS" at -300.099,-48.656 h3.5
  text "ELECTRICAL TEST" at -300.099,-52.656 h2.79
  text "NONE" at -263.099,-52.656 h2.79
  text "FIXTURE" at -249.099,-52.656 h2.79
  text "FLYING PROBE" at -231.099,-52.656 h2.79
  text "MANUFACTURER LOGO" at -300.099,-55.656 h2.79
  text "YES" at -263.099,-55.656 h2.79
  text "NO" at -249.099,-55.656 h2.79
  text "BATCH No ON S/SCREEN" at -300.099,-58.656 h2.79
  text "YES" at -263.099,-58.656 h2.79
  text "NO" at -249.099,-58.656 h2.79
  text "CERTIFICATE REQ'D" at -300.099,-61.656 h2.79
  text "E-TEST" at -263.099,-61.656 h2.79
  text "UL" at -249.099,-61.656 h2.79
  text "IPC-6011/12" at -237.099,-61.656 h2.79
  text "MIL-SPEC P-55110" at -217.099,-61.656 h2.79
  text "MANUFACTURING DATA" at -302.149,-70.406 h3.5
  text "FILENAME.EXT:" at -266.429,-75.335 h3.5
  text ".GERBER FILENAME" at -239.429,-75.335 h3.5
  text "GERBER DATA" at -300.149,-75.406 h3.5
  text "TOP COPPER" at -300.149,-79.406 h2.79
  text "YES" at -258.149,-79.406 h2.79
  text "NO" at -246.149,-79.406 h2.79
  text ". GTL" at -237.149,-79.406 h2.79
  text "BOTTOM COPPER" at -300.149,-82.406 h2.79
  text "YES" at -258.149,-82.406 h2.79
  text "NO" at -246.149,-82.406 h2.79
  text ". GBL" at -237.149,-82.406 h2.79
  text "TOP SOLDER MASK" at -300.149,-87.406 h2.79
  text "YES" at -258.149,-87.406 h2.79
  text "NO" at -246.149,-87.406 h2.79
  text ". GTS" at -237.149,-87.406 h2.79
  text "BOTTOM SOLDER MASK" at -300.149,-90.406 h2.79
  text "YES" at -258.149,-90.406 h2.79
  text "NO" at -246.149,-90.406 h2.79
  text ". GBS" at -237.149,-90.406 h2.79
  text "TOP OVERLAY" at -300.149,-93.406 h2.79
  text "YES" at -258.149,-93.406 h2.79
  text "NO" at -246.149,-93.406 h2.79
  text ". GTO" at -237.149,-93.406 h2.79
  text "BOTTOM OVERLAY" at -300.149,-96.406 h2.79
  text "YES" at -258.149,-96.406 h2.79
  text "NO" at -246.149,-96.406 h2.79
  text ". GBO" at -237.149,-96.406 h2.79
  text "TOP SOLDER PASTE" at -300.149,-99.406 h2.79
  text "YES" at -258.149,-99.406 h2.79
  text "NO" at -246.149,-99.406 h2.79
  text ". GTP" at -237.149,-99.406 h2.79
  text "BOTTOM SOLDER PASTE" at -300.149,-102.406 h2.79
  text "YES" at -258.149,-102.406 h2.79
  text "NO" at -246.149,-102.406 h2.79
  text ". GBP" at -237.149,-102.406 h2.79
  text "TOP SELECTIVE GOLD" at -300.149,-105.406 h2.79
  text "YES" at -258.149,-105.406 h2.79
  text "NO" at -246.149,-105.406 h2.79
  text ". GTG" at -237.149,-105.406 h2.79
  text "BOTTOM SELECTIVE GOLD" at -300.149,-108.406 h2.79
  text "YES" at -258.149,-108.406 h2.79
  text "NO" at -246.149,-108.406 h2.79
  text ". GBG" at -237.149,-108.406 h2.79
  text "TOP PEELABLE BLUE" at -300.149,-111.406 h2.79
  text "YES" at -258.149,-111.406 h2.79
  text "NO" at -246.149,-111.406 h2.79
  text ". GTB" at -237.149,-111.406 h2.79
  text "BOTTOM PEELABLE BLUE" at -300.149,-114.406 h2.79
  text "YES" at -258.149,-114.406 h2.79
  text "NO" at -246.149,-114.406 h2.79
  text ". GBB" at -237.149,-114.406 h2.79
  text "MANUFACTURING DRAWING" at -300.099,-119.275 h2.79
  text "YES" at -258.099,-119.275 h2.79
  text "NO" at -246.099,-119.275 h2.79
  text ". GM2" at -237.099,-119.275 h2.79
  text "PCB OUTLINE" at -300.099,-122.275 h2.79
  text "YES" at -258.099,-122.275 h2.79
  text "NO" at -246.099,-122.275 h2.79
  text ". GM1" at -237.099,-122.275 h2.79
  text "DRILL GUIDE" at -300.099,-125.275 h2.79
  text "YES" at -258.099,-125.275 h2.79
  text "NO" at -246.099,-125.275 h2.79
  text ". GG1" at -237.099,-125.275 h2.79
  text "DRILL DRAWING" at -300.099,-128.275 h2.79
  text "YES" at -258.099,-128.275 h2.79
  text "NO" at -246.099,-128.275 h2.79
  text ". GD1" at -237.099,-128.275 h2.79
  text ".GERBER FILENAME" at -239.429,-133.504 h2.5
  text "-RoundHoles.TXT" at -209.829,-133.504 h2.5
  text "YES" at -258.149,-133.525 h2.79
  text "NO" at -246.149,-133.525 h2.79
  text "DRILL SET #1 (ROUND)" at -300.149,-133.656 h2.79
  text "DRILL SET #2 (SLOTS)" at -300.149,-136.656 h2.79
  text ".GERBER FILENAME" at -239.479,-136.754 h2.5
  text "-SlotHoles.TXT" at -209.879,-136.754 h2.5
  text "YES" at -258.149,-136.775 h2.79
  text "NO" at -246.149,-136.775 h2.79
  text ".ZIP" at -224.099,-143.525 h2.79
  text ".GERBER FILENAME" at -257.179,-143.585 h2.79
  text "MANUFACTURING ZIP FILENAME:" at -300.149,-143.656 h2.79
  text "THIS DOCUMENT IS THE PROPERTY OF ???,  AND MAY NOT BE COPIED OR USED FOR ANY PURPOSE OTHER THAN THAT FOR WHICH IT IS SUPPLIED WITHOUT PERMISSION IN WRITING FROM THE OWNER." at 232.821,-198.835 h3 r90
  text "SPECIAL INSTRUCTIONS" at -302.149,-202.406 h3.5
  text ".COPYRIGHT_YEAR" at 232.821,-206.435 h3 r90
  text "C" at 233.121,-210.235 h3 r90
  text "SCALE:" at 225.308,-220.575 h2.5
  text "TITLE:" at 134.558,-221.234 h3.5
  text ".ECP_REV_D" at 16.071,-221.585 h3
  text ".ECP_DATE_D" at 33.821,-221.585 h3
  text ".ECP_D" at 71.571,-221.585 h3
  text "ORIG A2" at 223.808,-224.984 h3
  text ".ECP_REV_C" at 16.071,-226.585 h3
  text ".ECP_DATE_C" at 33.821,-226.585 h3
  text ".ECP_C" at 71.571,-226.585 h3
  text ".Project_Title" at 134.821,-228.085 h3
  text "SHEET:" at 225.308,-229.075 h2.5
  text ".ECP_REV_B" at 16.071,-231.585 h3
  text ".ECP_DATE_B" at 33.821,-231.585 h3
  text ".ECP_B" at 71.571,-231.585 h3
  text "1 OF 12" at 225.321,-233.335 h3
  text ".ECP_REV_A" at 16.071,-236.585 h3
  text ".ECP_DATE_A" at 33.821,-236.585 h3
  text ".ECP_A" at 71.571,-236.585 h3
  text "DRAWING NUMBER:" at 81.308,-236.734 h3.5
  text "PCB FILENAME:" at 134.558,-236.734 h3.5
  text "SCH FILENAME:" at 180.058,-236.734 h3.5
  text "REVISION:" at 223.821,-236.835 h2.5
  text ".Project_Document_Number" at 82.071,-240.585 h3
  text ".PCBFilename" at 134.821,-240.585 h3
  text ".Project_Document_Number" at 180.821,-240.585 h3
  text ".REV" at 228.071,-240.585 h3
  text ".Print_Date" at -34.524,-240.856 h2.79
  text ".Print_Time" at -20.024,-240.856 h2.79
  text "DATESTAMP OF THIS PRINT:" at -70.524,-241.356 h2.75
  text "V01.2" at -300.349,-241.525 h3
  text "REV" at 13.821,-241.835 h3.5
  text "DATE" at 30.821,-241.835 h3.5
  text "ENGINEER" at 45.321,-241.835 h3.5
  text "ECO #" at 67.321,-241.835 h3.5
Mechanical Data 1:
  rectangle: -44.27,-160.56 43.77,-91.75
Assembly Top:
  drawing of 2868 lines, arcs and shapes, not listed
Assembly Bot:
  lines w0.127: -9.546,-198.425 ccw(c-9.482,-198.425) -9.419,-198.425 ccw(c-9.482,-198.425) -9.546,-198.425
  lines w0.3: -104.487,-215.187 -92.237,-215.187 ; -104.487,-206.937 -92.237,-206.937 ; -92.237,-223.687 -92.237,-198.437 ; -92.237,-213.687 123.013,-213.687 ; -48.737,-223.687 -48.737,-213.687 ; -3.006,-223.571 -3.006,-198.425 ; 49.763,-223.687 49.763,-198.437 ; 49.763,-218.437 123.013,-218.437 ; 49.763,-208.687 123.013,-208.687 ; 49.763,-203.687 123.013,-203.687 ; 68.568,-223.762 68.568,-198.616 ; 86.544,-223.787 86.544,-198.616 ; 104.689,-223.737 104.689,-198.616
  lines w0.7: -104.5,-198.438 123,-198.438
  lines w1: -104.831,-223.978 -104.831,73.022 122.919,73.022 122.919,-223.978 -104.831,-223.978
  text "SCALE:" at -94.487,-201.028 h2.5
  text "TITLE:" at -3.737,-201.687 h3.5
  text ".ECP_D" at 59.25,-202.038 h3
  text ".ECP_DATE_D" at 97,-202.038 h3
  text ".ECP_REV_D" at 114.75,-202.038 h3
  text "ORIG A3" at -92.987,-205.437 h3
  text ".ECP_C" at 59.25,-207.038 h3
  text ".ECP_DATE_C" at 97,-207.038 h3
  text ".ECP_REV_C" at 114.75,-207.038 h3
  text ".Assembly_Project_Title" at -4,-208.538 h3
  text "SHEET:" at -94.487,-209.528 h2.5
  text ".ECP_B" at 59.25,-212.038 h3
  text ".ECP_DATE_B" at 97,-212.038 h3
  text ".ECP_REV_B" at 114.75,-212.038 h3
  text "2 OF 2" at -94.5,-213.788 h3
  text ".ECP_A" at 59.25,-217.038 h3
  text ".ECP_DATE_A" at 97,-217.038 h3
  text ".ECP_REV_A" at 114.75,-217.038 h3
  text "SCH FILENAME:" at -49.237,-217.187 h3.5
  text "PCB FILENAME:" at -3.737,-217.187 h3.5
  text "DRAWING NUMBER:" at 49.513,-217.187 h3.5
  text "REVISION:" at -93,-217.288 h2.5
  text ".REV" at -97.25,-221.038 h3
  text ".Project_Document_Number" at -50,-221.038 h3
  text ".PCBFilename" at -4,-221.038 h3
  text ".Assembly_Document_Number" at 48.75,-221.038 h3
  text "ECO #" at 63.5,-222.288 h3.5
  text "ENGINEER" at 85.5,-222.288 h3.5
  text "DATE" at 100,-222.288 h3.5
  text "REV" at 117,-222.288 h3.5

## Text inside footprints (layer, text, board x,y; h text height)
P1: Assembly Bot "6" at -2.706,-83.367 h1.5 r180; Assembly Bot "1" at -15.2,-83.5 h1.5 r180; Bottom Overlay "1" at -17.133,-83.087 h1.5 r180
U1: Assembly Bot "1" at -37.21,-84.8 h1.5 r90; Assembly Bot "2" at -37.16,-86.625 h1.5 r90
U2: Assembly Bot "3" at -26.2,-90.21 h1.5 r180; Assembly Bot "1" at -28,-90.21 h1.5 r180
U3: Assembly Bot "3" at -12.54,-90.1 h1.5 r180; Assembly Bot "1" at -14.34,-90.1 h1.5 r180
U4: Assembly Bot "3" at 2,-90.15 h1.5 r180; Assembly Bot "1" at 0.2,-90.15 h1.5 r180
U5: Assembly Bot "1" at 14.5,-90.1 h1.5 r180; Assembly Bot "3" at 16.3,-90.1 h1.5 r180